# Altium PCB PCB.PcbDoc
Units mil, origin at the board's own origin, x right, y up, seen from the top; angles counter-clockwise.
Board outline 6000 x 4000 mil, 2 copper layers (Top Layer, Bottom Layer); 6 components, 8 nets, 12 pads, 0 vias.
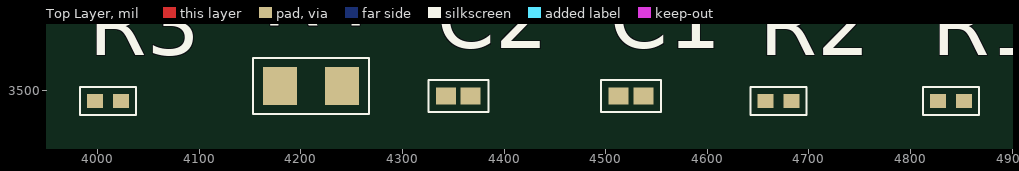
[diagram p0: Top Layer view]
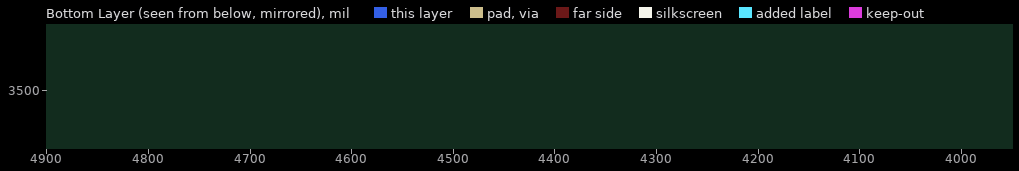
[diagram p1: Bottom Layer view, seen from below]

## Layer stack, top to bottom
Top Solder: solder mask 0.4, Solder Resist, Dk 3.5
Top Layer: signal copper 1.4
Dielectric 1: dielectric 12.6, FR-4, Dk 4.8
Bottom Layer: signal copper 1.4
Bottom Solder: solder mask 0.4, Solder Resist, Dk 3.5

## Board outline
1000,1000 7000,1000 7000,5000 1000,5000

## Design rules (kind name [scope] priority, off if disabled: settings)
Clearance [All] p1: gap=10 ignorepadtopadclearanceinfootprint=FALSE
PolygonConnect [All] p1: connectstyle=Relief reliefconductorwidth=10 reliefentries=4 polygonreliefangle="90 Angle" airgapwidth=10
RoutingVias [All] p1: holewidth=28 width=50 viastyle="Through Hole" minholewidth=28 minwidth=50 maxholewidth=28 maxwidth=50
SolderMaskExpansion [All] p1: expansion=4 istentingtop=FALSE
SupplyNets "Schematic Supply Nets_2" [InNet('VOUT')] p1: voltage=0.000
SupplyNets "Schematic Supply Nets_1" [InNet('4V5')] p2: voltage=0.000
SupplyNets "Schematic Supply Nets" [InNet('GND')] p3: voltage=0.000
Width [All] p1: maxlimit=10 minlimit=10 preferedwidth=10
30 further rules are at their usual default settings.

## Components (designator, comment, footprint, x,y, rotation, side; value= is the part's Value field where it differs from the comment)
C1 "4.7 μF" CAP_0201 4525,3495 r0 top
C2 "4.7 μF" CAP_0201 4355,3495 r0 top
R1 "110 kΩ" RES_0201 4840,3490 r0 top
R2 "390 kΩ" RES_0201 4670,3490 r0 top
R3 "220 kΩ" RES_0201 4010,3490 r0 top
R4 "960 Ω" RES_0603 4210,3505 r0 top

## Footprints (in the part's own frame and the unit in brackets; to place one, negate y for a bottom-side part, rotate by r counter-clockwise, add the part's x,y. Pads: shape width x height; smd on the part's side, far side on the other; paste and mask are expansions set on the pad)
CAP_0201 [mm]
  rect 0.5x0.42 smd mask+0.05: 1(-0.31,0) 2(0.31,0)
  silkscreen extent -0.75,-0.4 0.75,0.4, body extent -0.32,-0.17 0.32,0.17, height 0.33
RES_0201 [mm]
  rect 0.4x0.35 smd mask+0.05: 1(-0.325,0) 2(0.325,0)
  silkscreen extent -0.7,-0.35 0.7,0.35, body extent -0.32,-0.17 0.32,0.17, height 0.26
RES_0603 [mm]
  rect 0.85x0.95 smd mask+0.05: 1(-0.775,0) 2(0.775,0)
  silkscreen extent -1.45,-0.7 1.45,0.7, body extent -0.85,-0.45 0.85,0.45, height 0.55

## Part data
C1: library part CAP_0201, "Capacitor SMD 0201 Generic", Capacitance="10 nF", LCSC Part Number=C272853, Manufacturer=YAGEO, Manufacturer Part Number=CC0201KRX7R7BB103, Tolerance=10%
C2: library part CAP_0201, "Capacitor SMD 0201 Generic", LCSC Part Number=C272853, Manufacturer=YAGEO, Manufacturer Part Number=CC0201KRX7R7BB103, Tolerance=10%, Capacitance="4.7 μF"
R1: library part RES_0201, "Resistor SMD 0201", LCSC Part Number=C852221, Manufacturer=YAGEO, Manufacturer Part Number=RT0201BRD07200RL, Resistance="110 kOhm", Tolerance=0.1%
R2: library part RES_0201, "Resistor SMD 0201 Generic", LCSC Part Number=C852221, Manufacturer=YAGEO, Manufacturer Part Number=RT0201BRD07200RL, Resistance="390 kOhm", Tolerance=0.1%
R3: library part RES_0201, "Resistor SMD 0201 Generic", LCSC Part Number=C852221, Manufacturer=YAGEO, Manufacturer Part Number=RT0201BRD07200RL, Resistance="220 kOhm", Tolerance=0.1%
R4: library part RES_0603, "Resistor SMD 0603 Generic", LCSC Part Number=C5197511, Manufacturer=YAGEO, Manufacturer Part Number=NT0603BRD0711K1L, Tolerance=0.1%, Resistance="960 Ω"

## Nets (pads, with @x,y where several pads share a name; then routed paths per layer and width w, separated by ;. In a path a pad name is that pad's centre, name@x,y a point inside that pad or via, vN(x,y) a via of type N, cw(c..) or ccw(c..) an arc to the next point about the centre after c; other vN are vias at no path point)
4V5: 
EN_PIN: 
GND: 
NetDS1_2: 
VADJ: 
VADJ_1V8: 
VADJ_3V3: 
VOUT: 
pads on no net: C1.1 C1.2 C2.1 C2.2 R1.1 R1.2 R2.1 R2.2 R3.1 R3.2 R4.1 R4.2